# Altium PCB PCB1.PcbDoc
Units mm, origin at the board's own origin, x right, y up, seen from the top; angles counter-clockwise.
Board outline 150 x 100 mm, 2 copper layers (Top Layer, Bottom Layer); 16 components, 28 nets, 166 pads, 16 vias.
Unrouted connection lines stored in the file: 1.
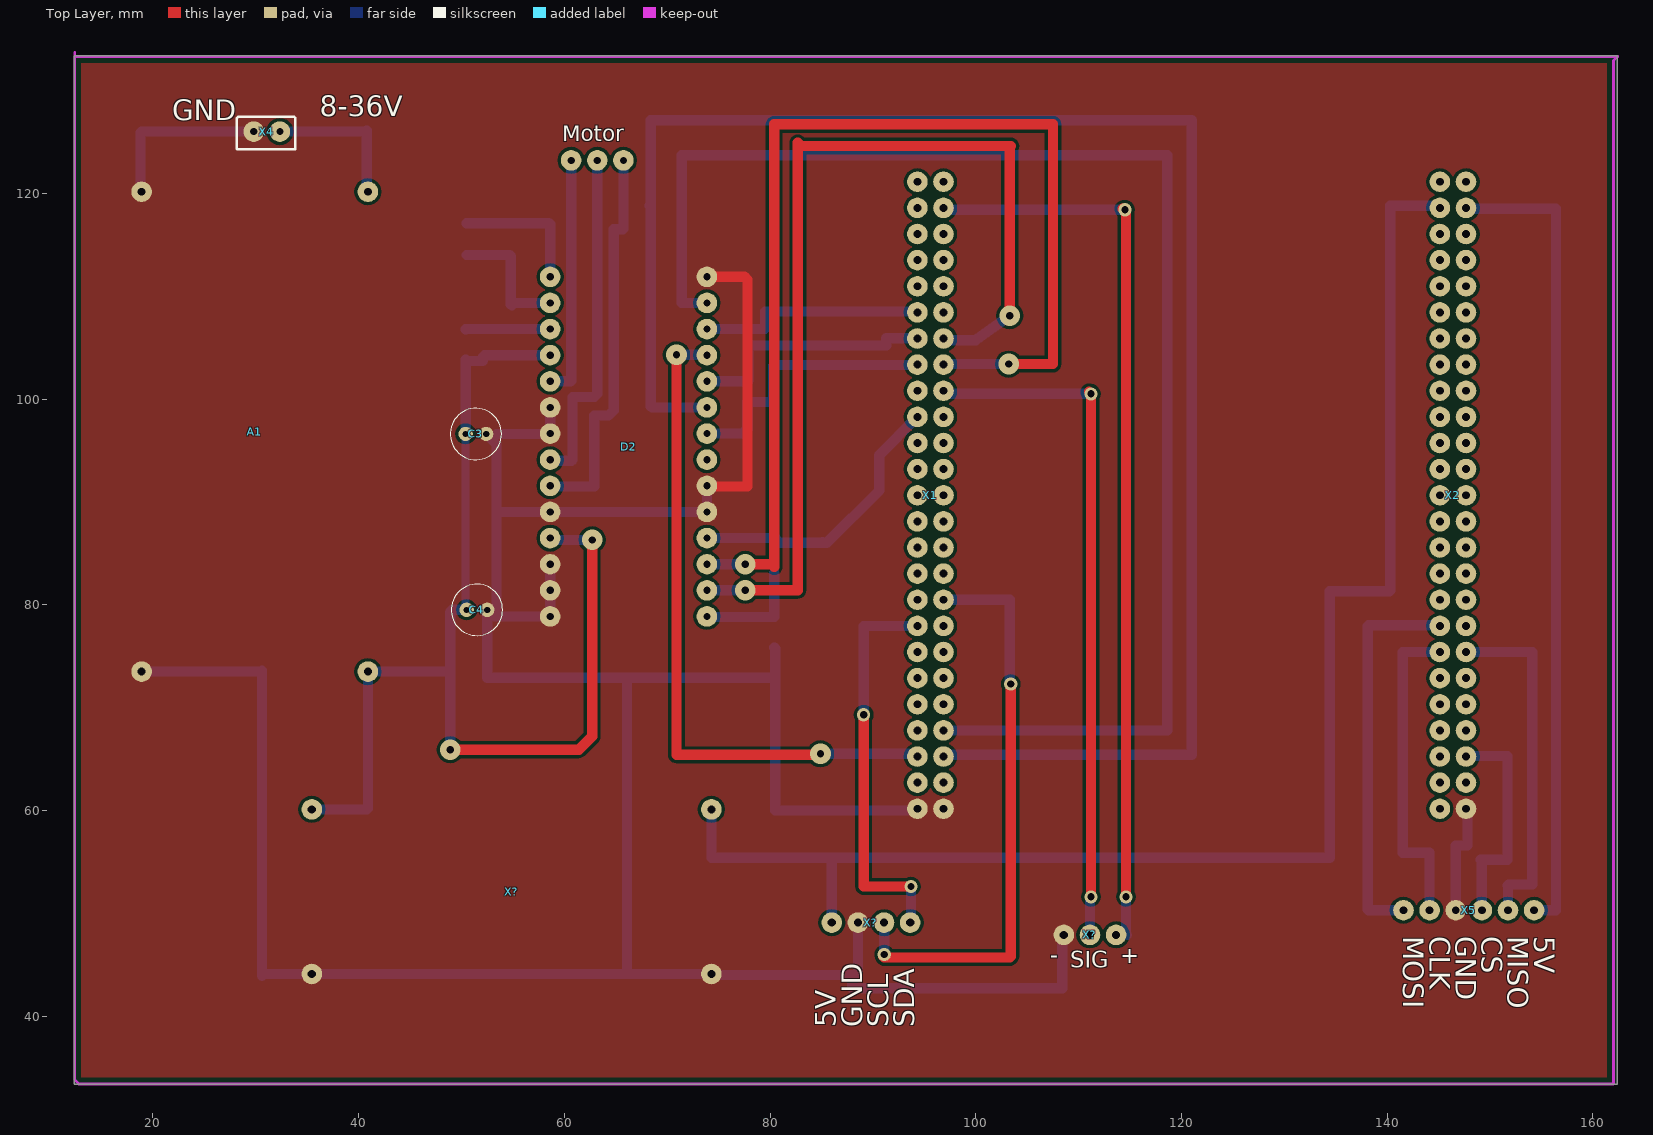
[diagram p0: Top Layer view]
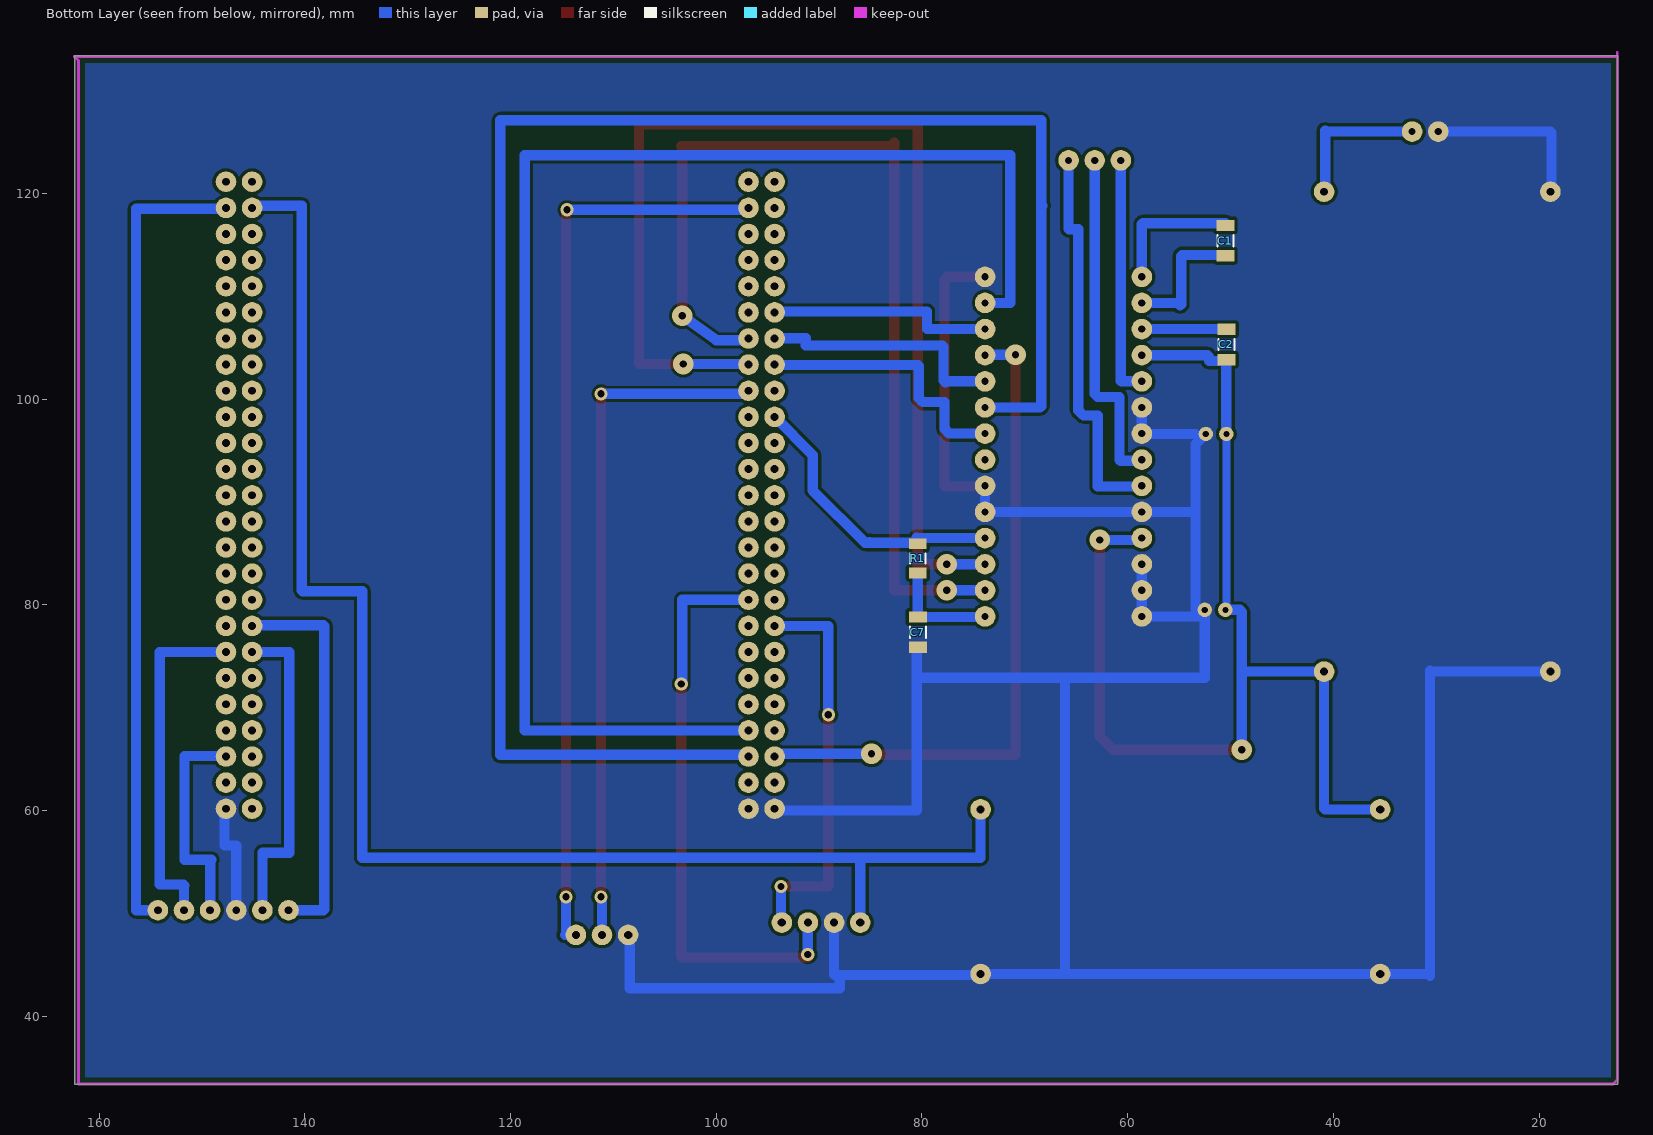
[diagram p1: Bottom Layer view, seen from below]
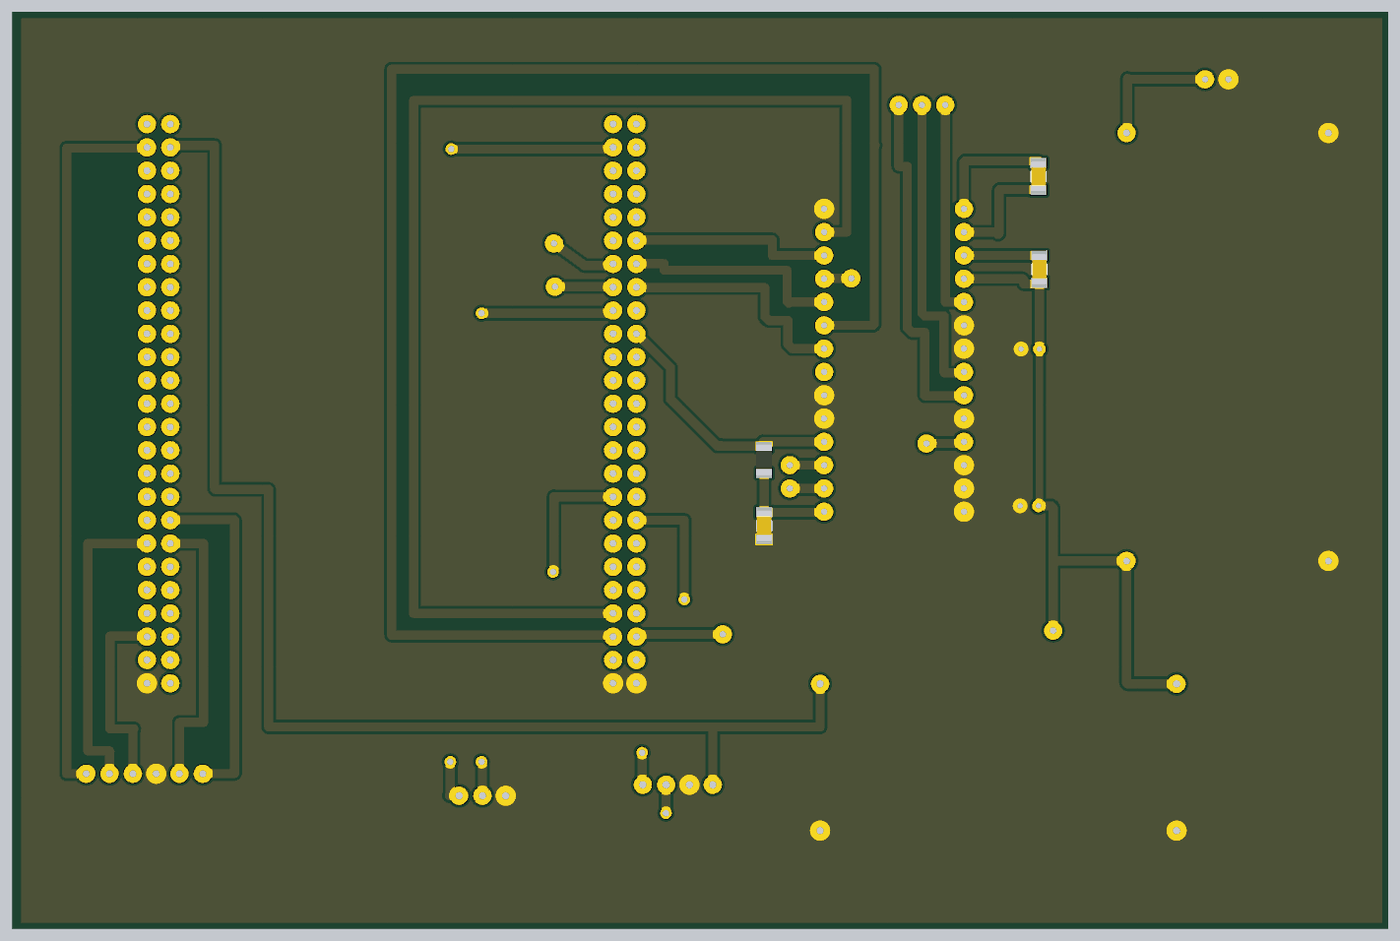
[diagram p2: 3D render of the assembled board from below, using the file's embedded part models]

## Layer stack, top to bottom
Top Solder: solder mask 0.0102, Solder Resist, Dk 3.5
Top Layer: signal copper 0.0356
Dielectric 1: dielectric 0.32, FR-4, Dk 4.8
Bottom Layer: signal copper 0.0356
Bottom Solder: solder mask 0.0102, Solder Resist, Dk 3.5

## Board outline
12.363,33.384 162.363,33.384 162.363,133.384 12.363,133.384

## Design rules (kind name [scope] priority, off if disabled: settings)
Clearance Clearance_1 [InPolygon vs OnLayer('Keep-Out Layer')] p1: gap=0.5 ignorepadtopadclearanceinfootprint=FALSE
Clearance [All] p2: gap=0.254 ignorepadtopadclearanceinfootprint=FALSE except(0: Arc-Hole Track-Hole SMDPad-Hole THPad-Hole Via-Hole Fill-Hole Poly-Hole Region-Hole Text-Hole; 0.3: Arc-Poly Track-Poly SMDPad-Poly THPad-Poly Via-Poly Fill-Poly Poly-Poly Poly-Region Poly-Text)
PolygonConnect [All] p1: connectstyle=Direct reliefconductorwidth=0.254 reliefentries=4 polygonreliefangle="90 Angle" airgapwidth=0.254
RoutingVias [All] p1: holewidth=0.711 width=1.27 viastyle="Through Hole" minholewidth=0.711 minwidth=1.27 maxholewidth=0.711 maxwidth=1.27
SolderMaskExpansion [All] p1: expansion=0.102
Width [All] p1: maxlimit=1 minlimit=0.254 preferedwidth=0.254 minimp=50.000000 maximp=50.000000 favimp=50.000000
30 further rules are at their usual default settings.

## Classes and differential pairs
component class Sheet1: A1 C1 C2 C3 C4 C7 D2 Motor R1 X1 X2 X4 X5 X?

## Components (designator, comment, footprint, x,y, rotation, side; value= is the part's Value field where it differs from the comment)
A1 "XL4050" XL4050_PCB 40.9,120.15 r270 top
C1 "0.01uF" "Ceramic 1206 - duplicate" 50.5,115.4 r270 bottom
C2 "0.1uF" "Ceramic 1206 - duplicate" 50.4,105.3 r270 bottom
C3 "100uF/16V" "CAP 50-35 5õ11" 50.4,96.6 r0 top
C4 "10uF/16V" "CAP 50-35 5õ11" 50.5,79.5 r0 top
C7 "0.47uF" "Ceramic 1206 - duplicate" 80.4,77.325 r270 bottom
D2 "DRV8313" "DRV8313 board" 58.62,111.88 r0 top
Motor "Motor" "Fhase out" 60.66,123.2 r0 top (schematic designator Motor1)
R1 "10kOhm" "Resistor 1206" 80.4,84.5 r90 bottom
X1 "*" STM32F4Discovery_P 94.32,121.12 r0 top
X2 "*" STM32F4Discovery_P 145.12,121.12 r0 top
X4 "*" "Power input" 32.34,126 r180 top
X5 "AS5048A" AS5048A_input 154.28,50.3 r270 top
X? "*" "I2C input" 86,49.1 r90 top
X? "*" Potentiometr 113.64,47.9 r180 top
X? "*" LM2596S_PCB 35.45,44.1 r90 top

## Footprints (in the part's own frame and the unit in brackets; to place one, negate y for a bottom-side part, rotate by r counter-clockwise, add the part's x,y. Pads: shape width x height; smd on the part's side, far side on the other; paste and mask are expansions set on the pad)
AS5048A_input [mm]
  round 2 hole 0.762: 1(0,0) 2(0,-2.54) 3(0,-5.08) 4(0,-7.62) 5(0,-10.16) 6(0,-12.7)
"CAP 50-35 5õ11" [mm]
  round 1.4 hole 0.6: 1(0,0) 2(2,0)
  silkscreen extent -1.5,-2.5 3.5,2.5
"Ceramic 1206 - duplicate" [mm] "Chip Capacitor, 2-Leads, Body 3,20x1,60mm, IPC Medium Density"
  rect 1.1x1.75 smd: 1(-1.475,0) 2(1.475,0)
  silkscreen extent -0.55,-0.77 0.55,0.77, body extent -1.6,-0.8 1.6,0.8, height 1.53
"DRV8313 board" [mm]
  round 2 hole 0.7: 1(0,0) 2(0,-2.54) 3(0,-5.08) 4(0,-7.62) 5(0,-10.16) 6(0,-12.7) 7(0,-15.24) 8(0,-17.78) 9(0,-20.32) 10(0,-22.86) 11(0,-25.4) 12(0,-27.94) 13(0,-30.48) 14(0,-33.02) 15(15.24,-33.02) 16(15.24,-30.48) 17(15.24,-27.94) 18(15.24,-25.4) 19(15.24,-22.86) 20(15.24,-20.32) 21(15.24,-17.78) 22(15.24,-15.24) 23(15.24,-12.7) 24(15.24,-10.16) 25(15.24,-7.62) 26(15.24,-5.08) 27(15.24,-2.54) 28(15.24,0)
"Fhase out" [mm]
  round 2 hole 0.7: 1(0,0) 2(2.54,0) 3(5.08,0)
"I2C input" [mm]
  round 2 hole 0.8: 1(0,0) 2(0,-2.54) 3(0,-5.08) 4(0,-7.62)
LM2596S_PCB [mm]
  round 2 hole 0.8: 1(16,0) 2(0,0) 3(16,-38.85) 4(0,-38.85)
Potentiometr [mm]
  round 2 hole 0.8: 1(0,0) 2(2.54,0) 3(5.08,0)
"Power input" [mm]
  round 2 hole 0.7: 1(0,0) 2(2.54,0)
  silkscreen extent -1.5,-1.43 4.18,1.73
"Resistor 1206" [mm] "Chip Resistor, 2-Leads, Body 3,10x1,60mm, IPC Medium Density"
  rect 1.05x1.7 smd: 1(-1.425,0) 2(1.425,0)
  silkscreen extent -0.5,-0.75 0.5,0.75, body extent -1.6,-0.85 1.6,0.85, height 0.6
STM32F4Discovery_P [mm]
  round 2 hole 0.762: 1(0,0) 2(2.54,0) 3(0,-2.54) 4(2.54,-2.54) 5(0,-5.08) 6(2.54,-5.08) 7(0,-7.62) 8(2.54,-7.62) 9(0,-10.16) 10(2.54,-10.16) 11(0,-12.7) 12(2.54,-12.7) 13(0,-15.24) 14(2.54,-15.24) 15(0,-17.78) 16(2.54,-17.78) 17(0,-20.32) 18(2.54,-20.32) 19(0,-22.86) 20(2.54,-22.86) 21(0,-25.4) 22(2.54,-25.4) 23(0,-27.94) 24(2.54,-27.94) 25(0,-30.48) 26(2.54,-30.48) 27(0,-33.02) 28(2.54,-33.02) 29(0,-35.56) 30(2.54,-35.56) 31(0,-38.1) 32(2.54,-38.1) 33(0,-40.64) 34(2.54,-40.64) 35(0,-43.18) 36(2.54,-43.18) 37(0,-45.72) 38(2.54,-45.72) 39(0,-48.26) 40(2.54,-48.26) 41(0,-50.8) 42(2.54,-50.8) 43(0,-53.34) 44(2.54,-53.34) 45(0,-55.88) 46(2.54,-55.88) 47(0,-58.42) 48(2.54,-58.42) 49(0,-60.96) 50(2.54,-60.96)
XL4050_PCB [mm]
  round 2 hole 0.762: 1(0,0) 2(0,-22) 3(46.65,0) 4(46.65,-22)

## Part data
A1: library part XL4050_PCB
C1 C2 C7: library part "Ceramic capacitor 1206"
C3: library part "Elecrolite, Ê50-35, 100uF/16V"
C4: library part "Electrolite, K50-35, 10uF/63V"
Motor: library part "Fhase out"
R1: library part Resistor
X1: library part STM32F4_Discovery_P1
X2: library part STM32F4_Discovery_P2
X4: library part "Power input"
X5: library part AS5048A_PCB
X?: library part "I2C input"
X?: library part Potentiometr
X?: library part LM2596S_PCB

## Via types
v1: diameter 2, hole 0.711, Top Layer to Bottom Layer, 8 vias
v2: diameter 1.27, hole 0.711, Top Layer to Bottom Layer, 8 vias

## Nets (pads, with @x,y where several pads share a name; then routed paths per layer and width w, separated by ;. In a path a pad name is that pad's centre, name@x,y a point inside that pad or via, vN(x,y) a via of type N, cw(c..) or ccw(c..) an arc to the next point about the centre after c; other vN are vias at no path point)
3V: X1.4 X?.1@113.64,47.9 | length 89.5
  Top Layer w1: v2@114.3,118.5 114.6,118.2 v2(114.6,51.6)
  Bottom Layer w1: X1.4 97.04,118.4 v2(114.5,118.4) ; X?.1@113.64,47.9 114.7,47.9 114.6,48 v2(114.6,51.6)
8-36V: A1.1 X4.1 | length 14.5
  Bottom Layer w1: X4.1 40.7,126 40.8,126.1 40.8,120.25 A1.1
12V: A1.3 C2.2 C3.1 C4.1 D2.4 D2.11 X?.1@35.45,60.1 | length 112.6
  Top Layer w1: v1(48.9,65.9) 61.4,65.9 62.7,67.2 v1(62.7,86.3)
  Bottom Layer w0.8: C4.1@50.4,79.6 C3.1
  Bottom Layer w1: X?.1@35.45,60.1 40.8,60.1 40.9,60.2 A1.3 48.9,73.5 ; v1(48.9,65.9) 48.9,73.5 ; C4.1@50.4,79.6 C4.1 49.1,79.5 48.9,79.3 48.9,73.5 ; C3.1 C2.2 50.525,103.7 52.1,103.7 52.1,104.1 52.26,104.26 D2.4 ; D2.11 58.8,86.3 v1(62.7,86.3)
+5V: X2.3 X2.4 X5.1 X?.1@86,49.1 X?.3@74.3,60.1 | length 224.4
  Bottom Layer w1: X?.3@74.3,60.1 74.3,55.4 86.1,55.4 ; X?.1@86,49.1 86,55.3 86.1,55.4 ; X2.3 144.9,118.8 140.3,118.8 140.3,81.4 140.2,81.3 134.4,81.3 134.4,55.4 86.1,55.4 ; X2.4 147.74,118.5 156.4,118.5 156.4,50.3 X5.1
CS: X2.46 X5.3 | length 21.7
  Bottom Layer w1: X2.46 147.72,65.3 151.7,65.3 151.7,55.2 149.1,55.2 149.2,55.1 X5.3
EN1: D2.26 X1.11 | length 22.2
  Bottom Layer w1: D2.26 79.5,106.8 79.5,108.5 X1.11@94.32,108.5
EN2: D2.24 X1.13 | length 24.6
  Bottom Layer w1: D2.24 77.58,101.72 77.7,101.6 77.9,101.8 77.9,105.1 78,105.2 91.3,105.2 91.3,105.9 94.3,105.9 X1.13
EN3: D2.22 X1.15 | length 26.6
  Bottom Layer w1: D2.22 77.34,96.64 77.8,97.1 77.8,99.7 79.9,99.7 80.3,100.1 80.3,103.2 80.4,103.3 X1.15@94.32,103.3
GND: A1.2 A1.4 C3.2 C4.2 C7.2 D2.6 D2.7 D2.10 D2.12 D2.13 D2.14 D2.19 D2.20 D2.28 X1.49 X1.50 X2.50 X4.2 X5.4 X?.2@35.45,44.1 X?.2@88.54,49.1 X?.3@108.56,47.9 X?.4@74.3,44.1 | length 342
  Top Layer w1: D2.28 77.52,111.88 77.8,111.6 77.8,91.5 D2.20@73.92,91.5
  Bottom Layer w1: A1.4 30.5,73.5 30.6,73.6 30.6,43.9 30.8,44.1 35.45,44.1 66,44.1 ; A1.2 18.8,120.25 18.8,125.9 18.9,126 X4.2 ; C3.2 53.4,95.6 53.4,89.1 ; 53.4,96.6 58.58,96.6 D2.7 D2.6 ; D2.12 D2.13 D2.14 53.14,78.86 C4.2 ; D2.20@73.92,91.5 D2.20 D2.19 D2.10 53.48,89.02 53.4,89.1 ; C7.2 80.5,75.75 80.5,72.9 ; X?.2@88.54,49.1 88.54,44.04 88.5,44 87.8,44 ; X1.49@94.6,60 80.5,60 80.5,72.9 ; X?.3@108.36,48.2 108.4,48.16 108.4,42.7 88,42.7 88,43.8 87.8,44 ; X5.4@146.6,50.24 X5.4 146.66,56.56 146.7,56.6 147.8,56.6 147.8,60.02 X2.50 ; C4.2 52.5,72.9 66.1,72.9 ; C4.2 53.3,79.5 53.4,79.6 53.4,89.1 ; 66,44.1 66.1,44.2 66.1,72.9 ; 66,44.1 74.3,44.1 74.4,44 87.8,44 ; 66.1,72.9 80.5,72.9
IN1: D2.27 X1.44 | length 141.7
  Bottom Layer w1: D2.27 71.4,109.34 71.4,123.7 118.6,123.7 118.6,67.78 X1.44
IN2: D2.25 X1.45 | length 65.5
  Top Layer w1: v1(70.9,104.3) 70.9,65.4 v1@84.8,65.4
  Bottom Layer w1: v1@70.94,104.26 v1(70.9,104.3) 73.82,104.3 D2.25 ; v1@84.8,65.4 v1(84.9,65.5) 94.06,65.5 X1.45
IN3: D2.23 X1.46 | length 171.8
  Bottom Layer w1: D2.23 68.52,99.18 68.4,99.3 68.4,118.7 68.3,118.8 68.4,118.9 68.4,127.1 121,127.1 121,65.4 X1.46@96.86,65.4
MISO: X2.38 X5.2 | length 33.9
  Bottom Layer w1: X2.38 154.1,75.4 154.1,52.8 151.8,52.8 151.7,52.7 151.74,52.66 X5.2
MOSI: X2.35 X5.6 | length 38.1
  Bottom Layer w1: X5.6 138.2,50.3 138.1,50.4 138.1,77.9 138.2,78 145.06,78 X2.35
NetC1_1: C1.1 D2.1 | length 13.3
  Bottom Layer w1: C1.1@50.5,117.1 58.5,117.1 58.62,116.98 D2.1
NetC1_2: C1.2 D2.2 | length 13
  Bottom Layer w1: C1.2@50.5,114 54.7,114 54.8,113.9 54.8,109.2 54.9,109.1 55.14,109.34 D2.2
NetC2_1: C2.1 D2.3 | length 8.2
  Bottom Layer w1: C2.1 50.425,106.8 D2.3
nFAULT: D2.18 R1.2 X1.19 | length 28.3
  Bottom Layer w1: D2.18 80.48,86.48 80.5,86.5 R1.2@80.5,86.025 ; R1.2 R1.2@80.5,86.025 ; 85.1,86.1 85.025,86.025 ; X1.19 90.6,94.54 90.6,91.1 85.525,86.025 85.025,86.025 ; R1.2@80.5,86.025 85.025,86.025
nReset: D2.16 X1.14 | length 97
  Top Layer w1: v1(77.6,81.4) 82.7,81.4 82.7,124.9 83,124.6 103.4,124.6 103.3,124.5 v1(103.3,108.1)
  Bottom Layer w1: D2.16 v1(77.6,81.4) ; X1.14 97.04,105.7 100,105.7 100.1,105.8 v1(103.3,108.1)
nSleep: D2.17 X1.16 | length 110.8
  Top Layer w1: v1(77.6,83.94) 80.16,83.94 80.4,83.7 80.4,126.7 107.5,126.7 107.5,103.4 v1(103.2,103.4)
  Bottom Layer w1: D2.17 v1(77.6,83.94) ; X1.16@96.86,103.6 97.06,103.4 v1(103.2,103.4)
OUT1: D2.5 Motor.1 | length 23.5
  Bottom Layer w1: D2.5 60.58,101.72 60.6,101.7 60.66,101.76 Motor.1
OUT2: D2.8 Motor.2 | length 33.6
  Bottom Layer w1: D2.8 58.72,94 60.7,94 60.8,94.1 60.8,100.2 62.9,100.2 63.2,100.5 Motor.2
OUT3: D2.9 Motor.3 | length 38.5
  Bottom Layer w1: D2.9 58.68,91.5 62.9,91.5 62.9,98.4 64.3,98.4 64.8,98.9 64.8,116.5 65.7,116.5 65.74,116.54 Motor.3
SCL: X1.34 X?.3@91.08,49.1 | length 56.9
  Top Layer w1: v2@91.08,45.88 91,45.8 91.1,45.7 103.3,45.7 103.4,45.8 v2(103.4,72.3)
  Bottom Layer w1: X?.3@91.08,49.1 91.1,49.08 v2(91.1,46) ; X1.34 103.28,80.48 103.3,80.5 v2@103.3,72.3
SCLK: X2.37 X5.5 | length 31.3
  Bottom Layer w1: X5.5 144.12,55.88 144.1,55.9 141.5,55.9 141.5,75.4 X2.37
SDA: X1.35 X?.4@93.62,49.1 | length 38.7
  Top Layer w1: v2(89.1,69.3) 89.1,52.6 v2(93.7,52.6)
  Bottom Layer w1: v2(89.1,69.3) 89.1,77.9 89.14,77.94 X1.35 ; X?.4@93.62,49.1 93.7,49.18 v2(93.7,52.6)
Sig: X1.18 X?.2@111.1,47.9 | length 67.4
  Top Layer w1: v2@111,100.7 v2(111.2,100.5) v2(111.2,51.6)
  Bottom Layer w1: X1.18 97.16,100.5 v2(111.2,100.5) ; X?.2@111.1,47.9 111.1,51.5 v2(111.2,51.6)
V3P3: C7.1 D2.15 R1.1 | length 10.8
  Bottom Layer w1: D2.15 73.92,78.8 C7.1 R1.1
pads on no net: D2.21 X1.1 X1.2 X1.3 X1.5 X1.6 X1.7 X1.8 X1.9 X1.10 X1.12 X1.17 X1.20 X1.21 X1.22 X1.23 X1.24 X1.25 X1.26 X1.27 X1.28 X1.29 X1.30 X1.31 X1.32 X1.33 X1.36 X1.37 X1.38 X1.39 X1.40 X1.41 X1.42 X1.43 X1.47 X1.48 X2.1 X2.2 X2.5 X2.6 X2.7 X2.8 X2.9 X2.10 X2.11 X2.12 X2.13 X2.14 X2.15 X2.16 X2.17 X2.18 X2.19 X2.20 X2.21 X2.22 X2.23 X2.24 X2.25 X2.26 X2.27 X2.28 X2.29 X2.30 X2.31 X2.32 X2.33 X2.34 X2.36 X2.39 X2.40 X2.41 X2.42 X2.43 X2.44 X2.45 X2.47 X2.48 X2.49

## Polygon pours and split planes (outlines as drawn)
GND on Top Layer "Top Layer-No Net" (solid, remove dead copper, pour order 2): 12.363,33.384 162.363,33.384 162.363,133.384 12.363,133.384
GND on Bottom Layer "Bottom Layer-No Net" (solid, remove dead copper, pour order 2): 12.363,33.384 162.363,33.384 162.363,133.384 12.363,133.384

## Keep-outs
Keep-Out Layer:
  lines w0.254: 12.4,133.3 162.4,133.3 162,132.9 162,33.4 12.8,33.4 12.4,33.8 12.4,133.7

## Silkscreen, mask and mechanical layers (free items; w line width, h text height)
Mechanical 1:
  the board outline again, w0.013

## Text inside footprints (layer, text, board x,y; h text height)
X4: Top Overlay "GND" at 21.9,127.1 h2; Top Overlay "8-36V" at 36.2,127.5 h2
X5: Top Overlay "5V" at 154.28,47.76 h2 r270; Top Overlay "MISO" at 151.74,47.76 h2 r270; Top Overlay "CS" at 149.2,47.76 h2 r270; Top Overlay "GND" at 146.66,47.76 h2 r270; Top Overlay "CLK" at 144.12,47.76 h2 r270; Top Overlay "MOSI" at 141.58,47.76 h2 r270
X?: Top Overlay "SIG" at 109.2,44.7 h1.6; Top Overlay "-" at 108,46.4 h1.6 r180; Top Overlay "+" at 115.9,46.5 h1.6 r180
X?: Top Overlay "SDA" at 94.02,38.94 h2 r90; Top Overlay "SCL" at 91.48,38.94 h2 r90; Top Overlay "GND" at 88.94,38.94 h2 r90; Top Overlay "5V" at 86.4,38.94 h2 r90